# EAGLE board MicroQuad-V0.2 (EAGLE 9.2.0)
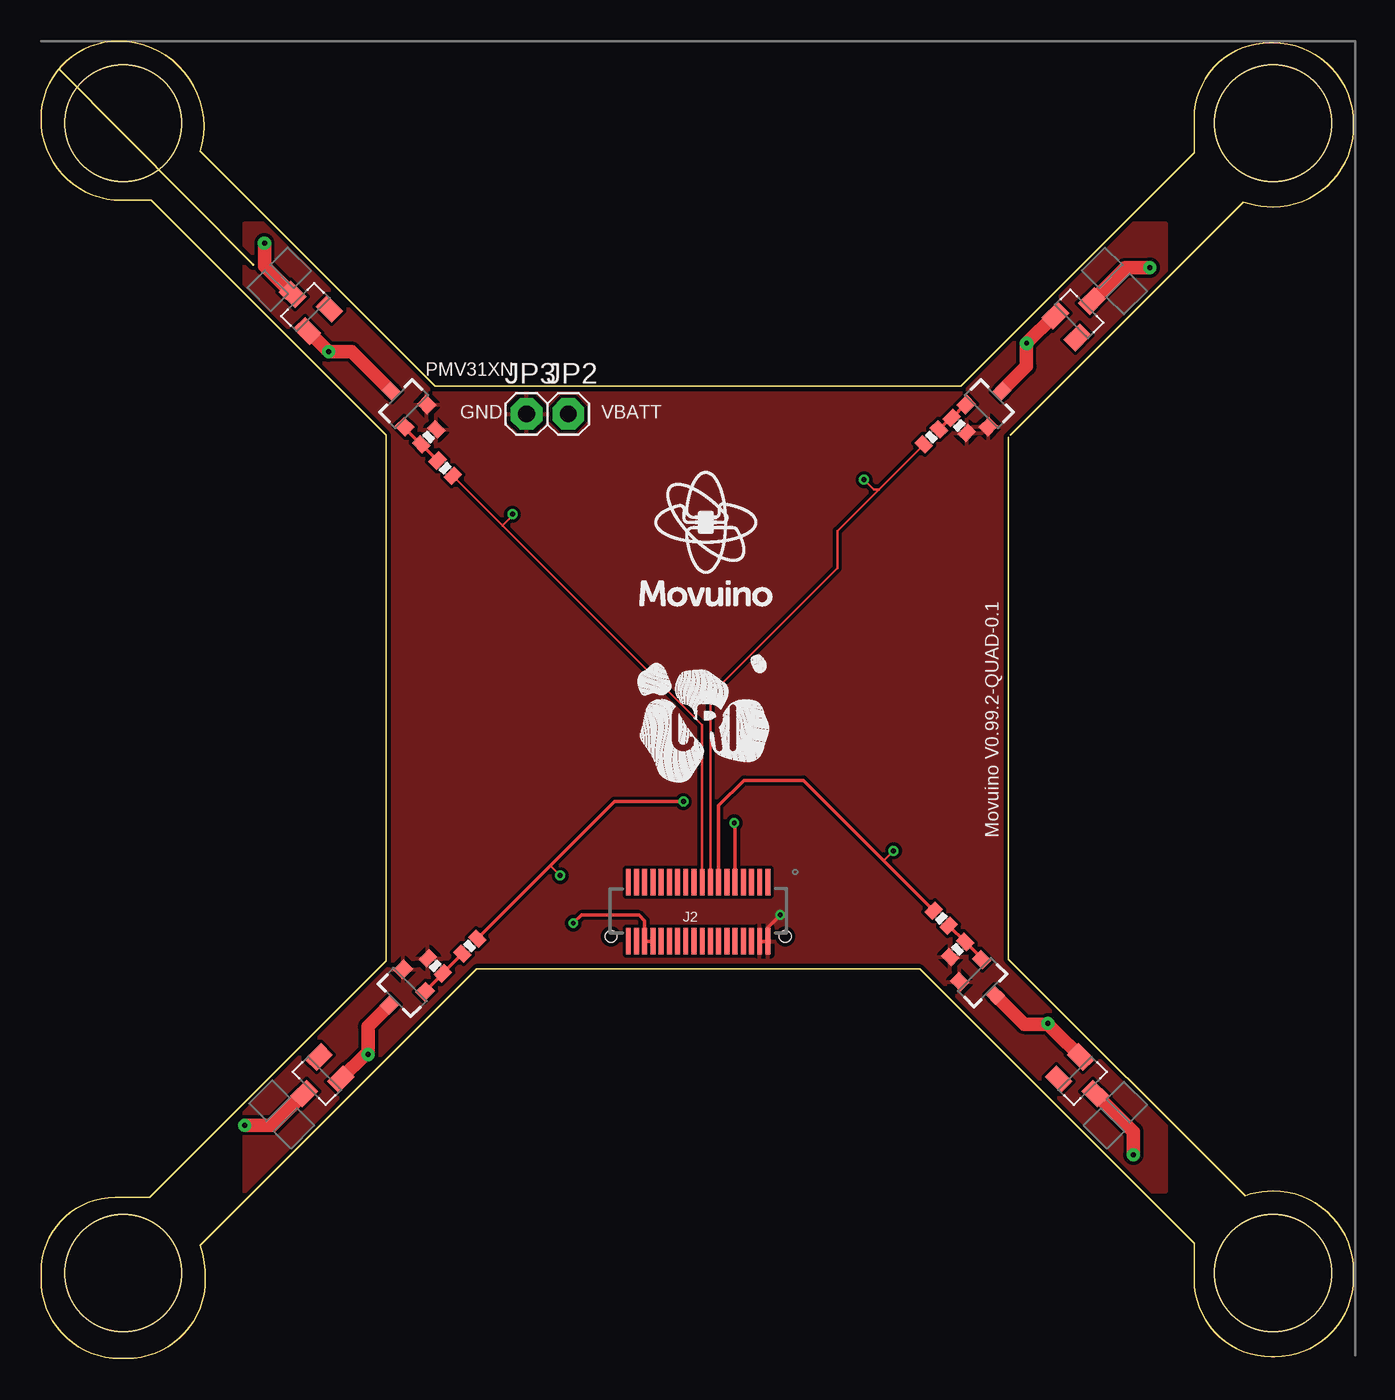
[diagram p0: board, top side]
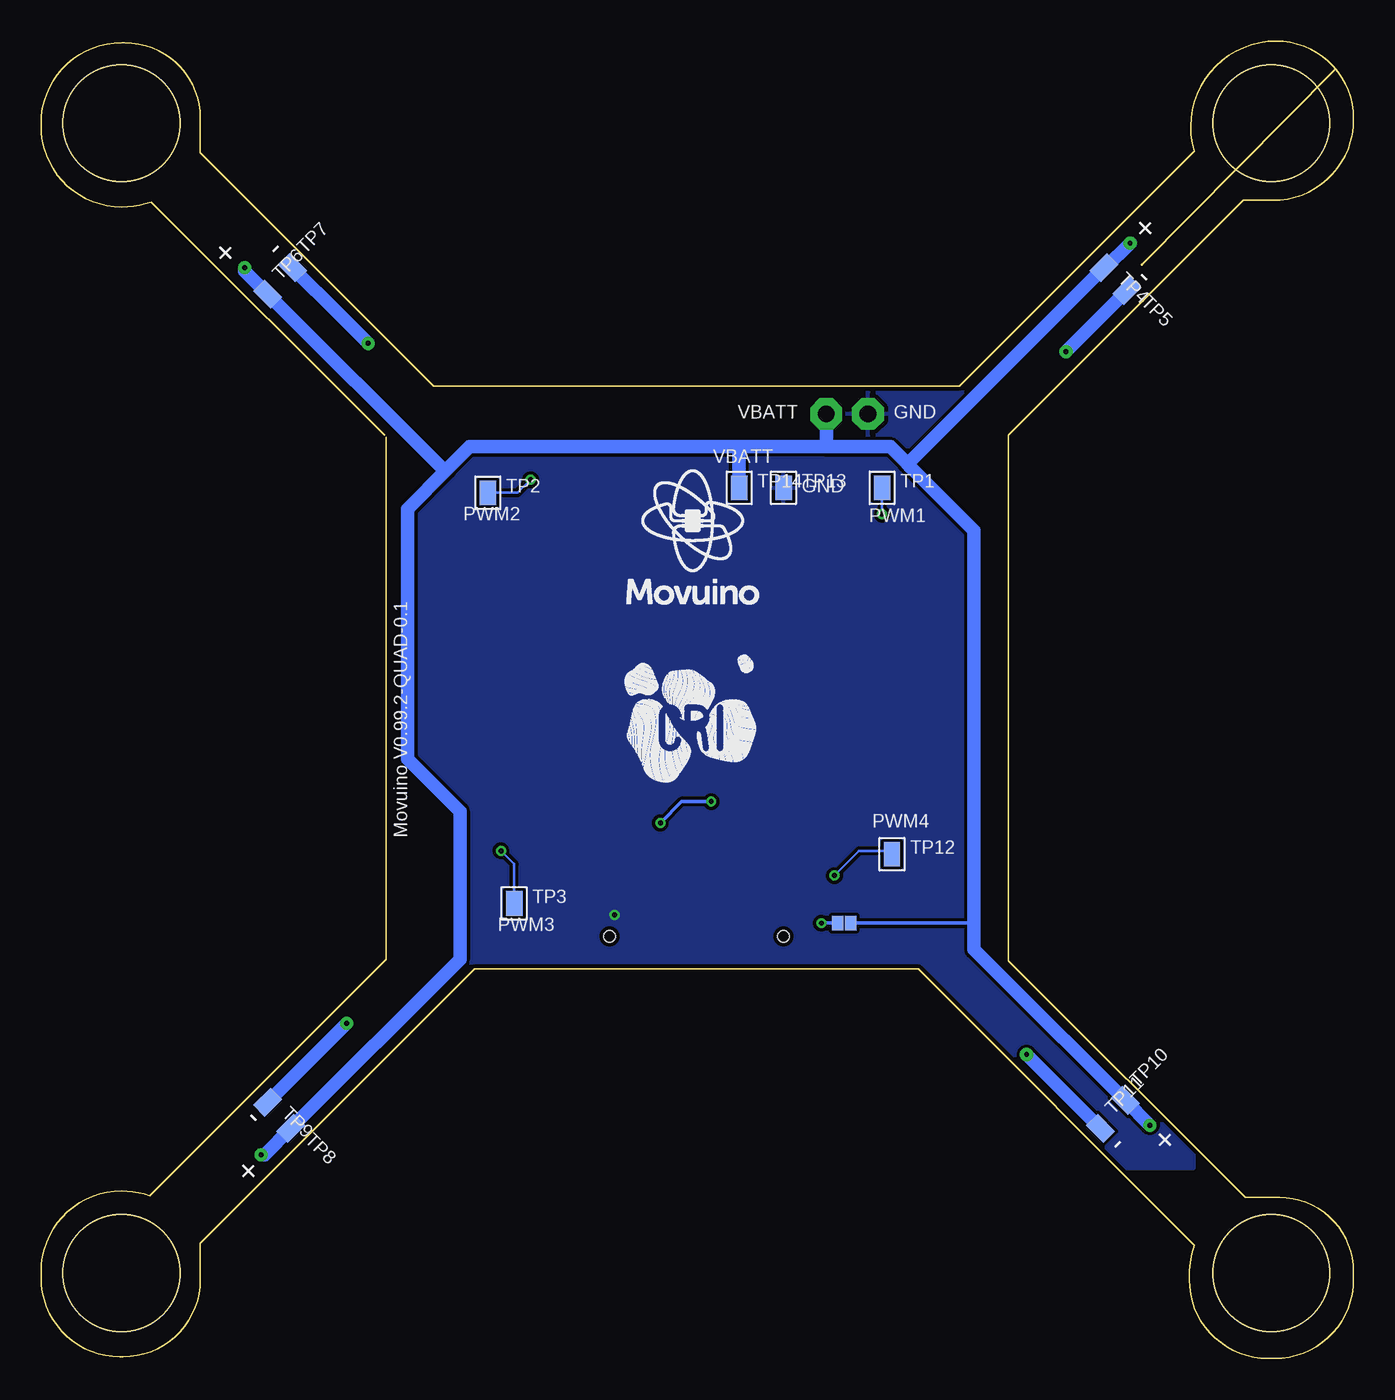
[diagram p1: board, bottom side, seen from below]

Size 79.9 x 80.2 mm. Coordinates in mm from the lower left corner, seen from the top.
Outline: 59,56.2 73.2,70.4 arc19 75,70.1 arc90 79.9,75 79.9,75.2 arc90 75,80.1 74.8,80.1 arc90 70.2,75.5 70.2,73.4 56,59.2 24,59.2 9.7,73.5 arc107 4.7,80.2 arc90 0,75.5 0,75.4 arc90 4.9,70.5 6.7,70.5 21,56.2 21,24.2 6.6,9.8 4.5,9.8 arc90 0,5.3 0,4.8 arc90 4.8,0 5.2,0 arc90 10,4.8 arc17 9.7,6.9 26.5,23.7 53.5,23.7 70.2,7 70.2,4.8 arc90 74.9,0.1 75.1,0.1 arc90 79.9,4.9 79.9,5.3 arc90 75,10.2 arc20 73.3,9.9 58.9,24.3 58.9,56.1
Outline: 1.1,78.5 12.9,66.6
Outline: circle at 5,75.2 radius 3.55
Outline: circle at 75,75.2 radius 3.55
Outline: circle at 75,5.2 radius 3.55
Outline: circle at 5,5.2 radius 3.55
Copper layers (1*16): Top 0.035mm / dielectric 1.5mm / Bottom 0.035mm
Design rules "PCBWAY_2layer_DRU_no_angle_cheap *": minimum track width 6mil, minimum drill 0.3mm, track to track 6mil, track to pad 6mil, pad to pad 6mil, via to via 6mil, smd to smd 0mil, copper to edge 10mil, drill to drill 10mil, minimum pad ring 10mil, minimum via ring 6mil, stop-mask expansion 2mil, vias tented up to drill 100mil, thermal gap 10mil
Net classes: 1 pcbway_smallest: width 0.102 mm, drill 0.2 mm, clearance 0.102 mm; 2 pcbway_cheap: width 0.152 mm, drill 0.3 mm, clearance 0.152 mm
Holes 7.1 mm at 5,5.2 75,5.2 75,75.2 5,75.2

## Footprints (pad centres in the part's own frame; a part is rotated, then mirrored left to right if it is on the bottom)
SOT23 = smd 1 x 1.4: 1 -0.95,-1.1; 2 0.95,-1.1; 3 0,1.1
DF12-36-DP-NL = smd 0.3 x 1.6: 1 -4.25,-1.8; 2 -4.25,1.8; 3 -3.75,-1.8; 4 -3.75,1.8; 5 -3.25,-1.8; 6 -3.25,1.8; 7 -2.75,-1.8; 8 -2.75,1.8; 9 -2.25,-1.8; 10 -2.25,1.8; 11 -1.75,-1.8; 12 -1.75,1.8; 13 -1.25,-1.8; 14 -1.25,1.8; 15 -0.75,-1.8; 16 -0.75,1.8; 17 -0.25,-1.8; 18 -0.25,1.8; 19 0.25,-1.8; 20 0.25,1.8; 21 0.75,-1.8; 22 0.75,1.8; 23 1.25,-1.8; 24 1.25,1.8; 25 1.75,-1.8; 26 1.75,1.8; 27 2.25,-1.8; 28 2.25,1.8; 29 2.75,-1.8; 30 2.75,1.8; 31 3.25,-1.8; 32 3.25,1.8; 33 3.75,-1.8; 34 3.75,1.8; 35 4.25,-1.8; 36 4.25,1.8 | hole 0.7: -5.3,1.5; 5.3,1.5
1X01 = drill 1.016 pad 1.93 octagon: 1 0,0
SOT23-3 = smd 0.8 x 0.9: 1 -0.95,-1; 2 0.95,-1; 3 0,1.1
0402-RES = smd 0.7 x 0.9: 1 -0.65,0; 2 0.65,0
PAD-1X1.5 = smd 1 x 1.5: P$1 0,0
PAD-1X1.5_NOSILK = smd 1 x 1.5: P$1 0,0
0402-JUMPER-CLOSED = smd 0.7 x 0.9: 1 -0.4,0; 2 0.4,0

## Placement (x,y rotation side)
D1  BAT54  [SOT23]  63.2,63.6 315 top
D2  BAT54  [SOT23]  16.1,64 45 top
D3  BAT54  [SOT23]  63.4,16.9 225 top
D4  BAT54  [SOT23]  16.8,16.9 135 top
J2  DF12-36NOLEGS  [DF12-36-DP-NL]  40,27.2 180 top
JP2  [1X01]  32.1,57.5 0 top
JP3  [1X01]  29.56,57.5 0 top
Q1  [SOT23-3]  57.7,58.1 315 top
Q2  [SOT23-3]  57.3,22.9 225 top
Q3  [SOT23-3]  22,22.3 135 top
Q4  [SOT23-3]  22.1,58.1 45 top
R1  100R  [0402-RES]  54.2,56.1 45 top
R2  10K  [0402-RES]  55.9,56.8 135 top
R3  100R  [0402-RES]  54.8,26.8 315 top
R4  10K  [0402-RES]  55.8,24.9 45 top
R5  100R  [0402-RES]  26.1,25.1 225 top
R6  10K  [0402-RES]  24,23.9 315 top
R7  100R  [0402-RES]  24.6,54.2 135 top
R8  10K  [0402-RES]  23.6,56.1 225 top
TP1  [PAD-1X1.5]  28.7,53 0 bottom
TP2  [PAD-1X1.5]  52.7,52.7 0 bottom
TP3  [PAD-1X1.5]  51.1,27.7 0 bottom
TP4  [PAD-1X1.5_NOSILK]  15.2,66.4 315 bottom
TP5  [PAD-1X1.5_NOSILK]  13.8,65 315 bottom
TP6  [PAD-1X1.5_NOSILK]  66.1,64.8 45 bottom
TP7  [PAD-1X1.5_NOSILK]  64.6,66.4 45 bottom
TP8  [PAD-1X1.5_NOSILK]  64.7,14 315 bottom
TP9  [PAD-1X1.5_NOSILK]  66.1,15.6 315 bottom
TP10  [PAD-1X1.5_NOSILK]  13.9,15.7 45 bottom
TP11  [PAD-1X1.5_NOSILK]  15.4,14 45 bottom
TP12  [PAD-1X1.5]  28.1,30.7 0 bottom
TP13  [PAD-1X1.5]  34.7,53 0 bottom
TP14  [PAD-1X1.5]  37.4,53 0 bottom
U$1  0402-JUMPERCLOSED-DEFAULT  [0402-JUMPER-CLOSED]  31,26.5 180 bottom
U$2  LOGO-CRI-NEW-110MM-BOTTOM-SILK  [LOGO_CRI-NEW-BMP10MM-BOTTOM]  40.2,38.6 0 top
U$3  LOGO_MOVUINOTOP  [LOGO_MOVUINO_BMP_10MM]  40.3,51 0 bottom
U$4  LOGO-CRI-NEW-110MM-BOTTOM-SILK  [LOGO_CRI-NEW-BMP10MM-BOTTOM]  40.5,38.6 0 bottom
U$5  LOGO_MOVUINOTOP  [LOGO_MOVUINO_BMP_10MM]  40.4,50.9 0 top

## Library data of the parts
D1-D4 = diode
J2 TP1-TP3 TP12-TP14 U$1 = movuinoV0
JP2 JP3 = adafruit
Q1-Q4 TP4-TP11 = movuino
R1 R3 R5 R7 = movuino; MF: TE Connectivity; MPN: CRG0402F100R; OC_MOUSER: 279-CRG0402F100R; OC_RS: 6678602; POWER_RATING: 0.063W; TOLERANCE: 1%
R2 R4 R6 R8 = movuino; MF: TE Connectivity; MPN: CRG0402F10K; OC_MOUSER: 279-CRG0402F10K; OC_RS: 6678848; POWER_RATING: 0.063W; TOLERANCE: 1%
U$2-U$5 = movuino_aestheticsV0

## Nets
GND [pcbway_cheap]: J2.2 J2.4 JP3.1 Q1.2 Q2.2 Q3.2 Q4.2 R2.1 R4.1 R6.1 R8.1 TP13.P$1
N$13 [pcbway_cheap]: Q4.1 R7.2 R8.2
N$14 [pcbway_cheap]: D2.1 Q4.3 TP5.P$1
N$16 [pcbway_cheap]: J2.5
N$17 [pcbway_cheap]: J2.7
N$18 [pcbway_cheap]: Q1.1 R1.2 R2.2
N$20 [pcbway_cheap]: J2.11
N$21 [pcbway_cheap]: D1.1 Q1.3 TP7.P$1
N$22 [pcbway_cheap]: Q2.1 R3.2 R4.2
N$24 [pcbway_cheap]: D3.1 Q2.3 TP9.P$1
N$25 [pcbway_cheap]: Q3.1 R5.2 R6.2
N$26 [pcbway_cheap]: D4.1 Q3.3 TP11.P$1
PWM1 [pcbway_cheap]: J2.17 R7.1 TP1.P$1
PWM2 [pcbway_cheap]: J2.15 R1.1 TP2.P$1
PWM3 [pcbway_cheap]: J2.13 R3.1 TP3.P$1
PWM4 [pcbway_cheap]: J2.9 R5.1 TP12.P$1
QUAD_V+ [pcbway_cheap]: D1.3 D2.3 D3.3 D4.3 JP2.1 TP4.P$1 TP6.P$1 TP8.P$1 TP10.P$1 TP14.P$1 U$1.1
VBATT [pcbway_cheap]: J2.30 J2.32 U$1.2

## Tracks (layer width: path | path; a pad name or v marks a point on that pad's centre or on a via)
GND  (via drill 0.3 pad 0.6)
  Top 0.2: J2.4 J2.2 44.25,26.25 v45,27
  pour Bottom (isolate 0.203): 70.2,69.98 9.75,69.98 9.75,11.58 70.2,11.58
  pour Top (isolate 0.203): 68.5,69.08 12.35,69.08 12.35,10.18 68.5,10.18
N$13
  Top 0.2: R7.2 23.16,55.64 R8.2 22.14,56.65 Q4.1
N$14  (via drill 0.3 pad 0.8)
  Top 0.813: D2.1 16.25,62.55 v17.5,61.3 18.9,61.3 Q4.3
  Bottom 0.813: TP5.P$1 v17.5,61.3
N$18
  Top 0.2: R1.2 55.36,57.26 R2.2 56.24,58.07 Q1.1
N$21  (via drill 0.3 pad 0.8)
  Top 0.813: Q1.3 60,60.4 v60,61.8 61.69,63.49 D1.1
  Bottom 0.813: v60,61.8 61.7,63.5 TP7.P$1
N$22
  Top 0.2: R3.2 55.28,26.34 R4.2 57.27,24.36 Q2.1
N$24  (via drill 0.3 pad 0.8)
  Top 0.813: D3.1 61.72,19.92 61.3,20.34 | 61.3,20.34 v61.3,20.4 | Q2.3 59.86,20.34 61.3,20.34
  Bottom 0.813: v61.3,20.4 TP9.P$1
N$25
  Top 0.152: 25.64,24.62 R5.2
  Top 0.2: Q3.1 24.46,23.42 R6.2 25.64,24.62
N$26  (via drill 0.3 pad 0.8)
  Top 0.813: D4.1 19.74,18.5 v19.9,18.5 19.9,20.2 Q3.3
  Bottom 0.813: TP11.P$1 v19.9,18.5
PWM1  (via drill 0.3 pad 0.6)
  Top 0.152: J2.17 40.25,38.55 28.1,50.7 | 28.1,50.7 R7.1 | v28.7,51.4 28.7,51.3 28.1,50.7
  Bottom 0.152: TP1.P$1 v28.7,51.4
PWM2  (via drill 0.3 pad 0.6)
  Top 0.152: J2.15 40.75,40.38 48.48,48.1 48.48,50.38 51,52.9 | 51,52.9 R1.1 | v50.1,53.5 50.7,52.9 51,52.9
  Bottom 0.152: TP2.P$1 50.9,52.7 v50.1,53.5
PWM3  (via drill 0.3 pad 0.6)
  Top 0.152: v51.9,30.9 51.35,30.35 51.35,30.25
  Top 0.2: J2.13 41.25,33.65 42.8,35.2 46.4,35.2 51.35,30.25 R3.1
  Bottom 0.152: TP3.P$1 51.1,30.1 v51.9,30.9
PWM4  (via drill 0.3 pad 0.6)
  Top 0.152: v31.6,29.4 31.05,29.95 31.05,30.05
  Top 0.2: R5.1 31.05,30.05 34.9,33.9 v39.1,33.9 | v42.2,32.6 42.25,32.55 J2.9
  Bottom 0.152: TP12.P$1 28.3,30.9 30.1,30.9 v31.6,29.4
  Bottom 0.2: v39.1,33.9 40.9,33.9 v42.2,32.6
QUAD_V+  (via drill 0.3 pad 0.8)
  Top 0.813: D1.3 66,66.4 v67.5,66.4 | D2.3 13.6,66.5 v13.6,67.9 | D4.3 14.1,14.2 v12.4,14.2 | D3.3 66.5,13.8 v66.5,12.4
  Bottom 0.2: U$1.1 23.1,26.5
  Bottom 0.813: 32.1,55.5 28.2,55.5 27.2,54.5 | 55.2,54.1 57.6,51.7 57.6,36.5 54.4,33.3 54.4,24.3 TP8.P$1 66.3,12.4 v66.5,12.4 | 55.2,54.1 53.8,55.5 37.3,55.5 | 55.2,54.1 55.4,54.1 TP6.P$1 67.5,66.2 v67.5,66.4 | 27.2,54.5 26.9,54.2 23.1,50.4 23.1,26.5 23.1,24.9 21.4,23.2 TP10.P$1 v12.4,14.2 | 27.2,54.5 27.1,54.5 TP4.P$1 15.1,66.4 v13.6,67.9 | JP2.1 32.1,55.5 | TP14.P$1 37.4,55.4 37.3,55.5 | 32.1,55.5 37.3,55.5
VBATT  (via drill 0.3 pad 0.6)
  Top 0.2: v32.4,26.5 32.9,27 36.4,27 36.75,26.65 J2.32 J2.30
  Bottom 0.2: v32.4,26.5 U$1.2

## Text on the board
tNames: PMV31XN | GND | VBATT | Movuino V0.99.2-QUAD-0.1
bNames: + | - | - | + | GND | VBATT | VBATT | GND | PWM1 | PWM2 | Movuino V0.99.2-QUAD-0.1 | PWM4 | PWM3 | - | + | - | +